# Allegro board capture.brd
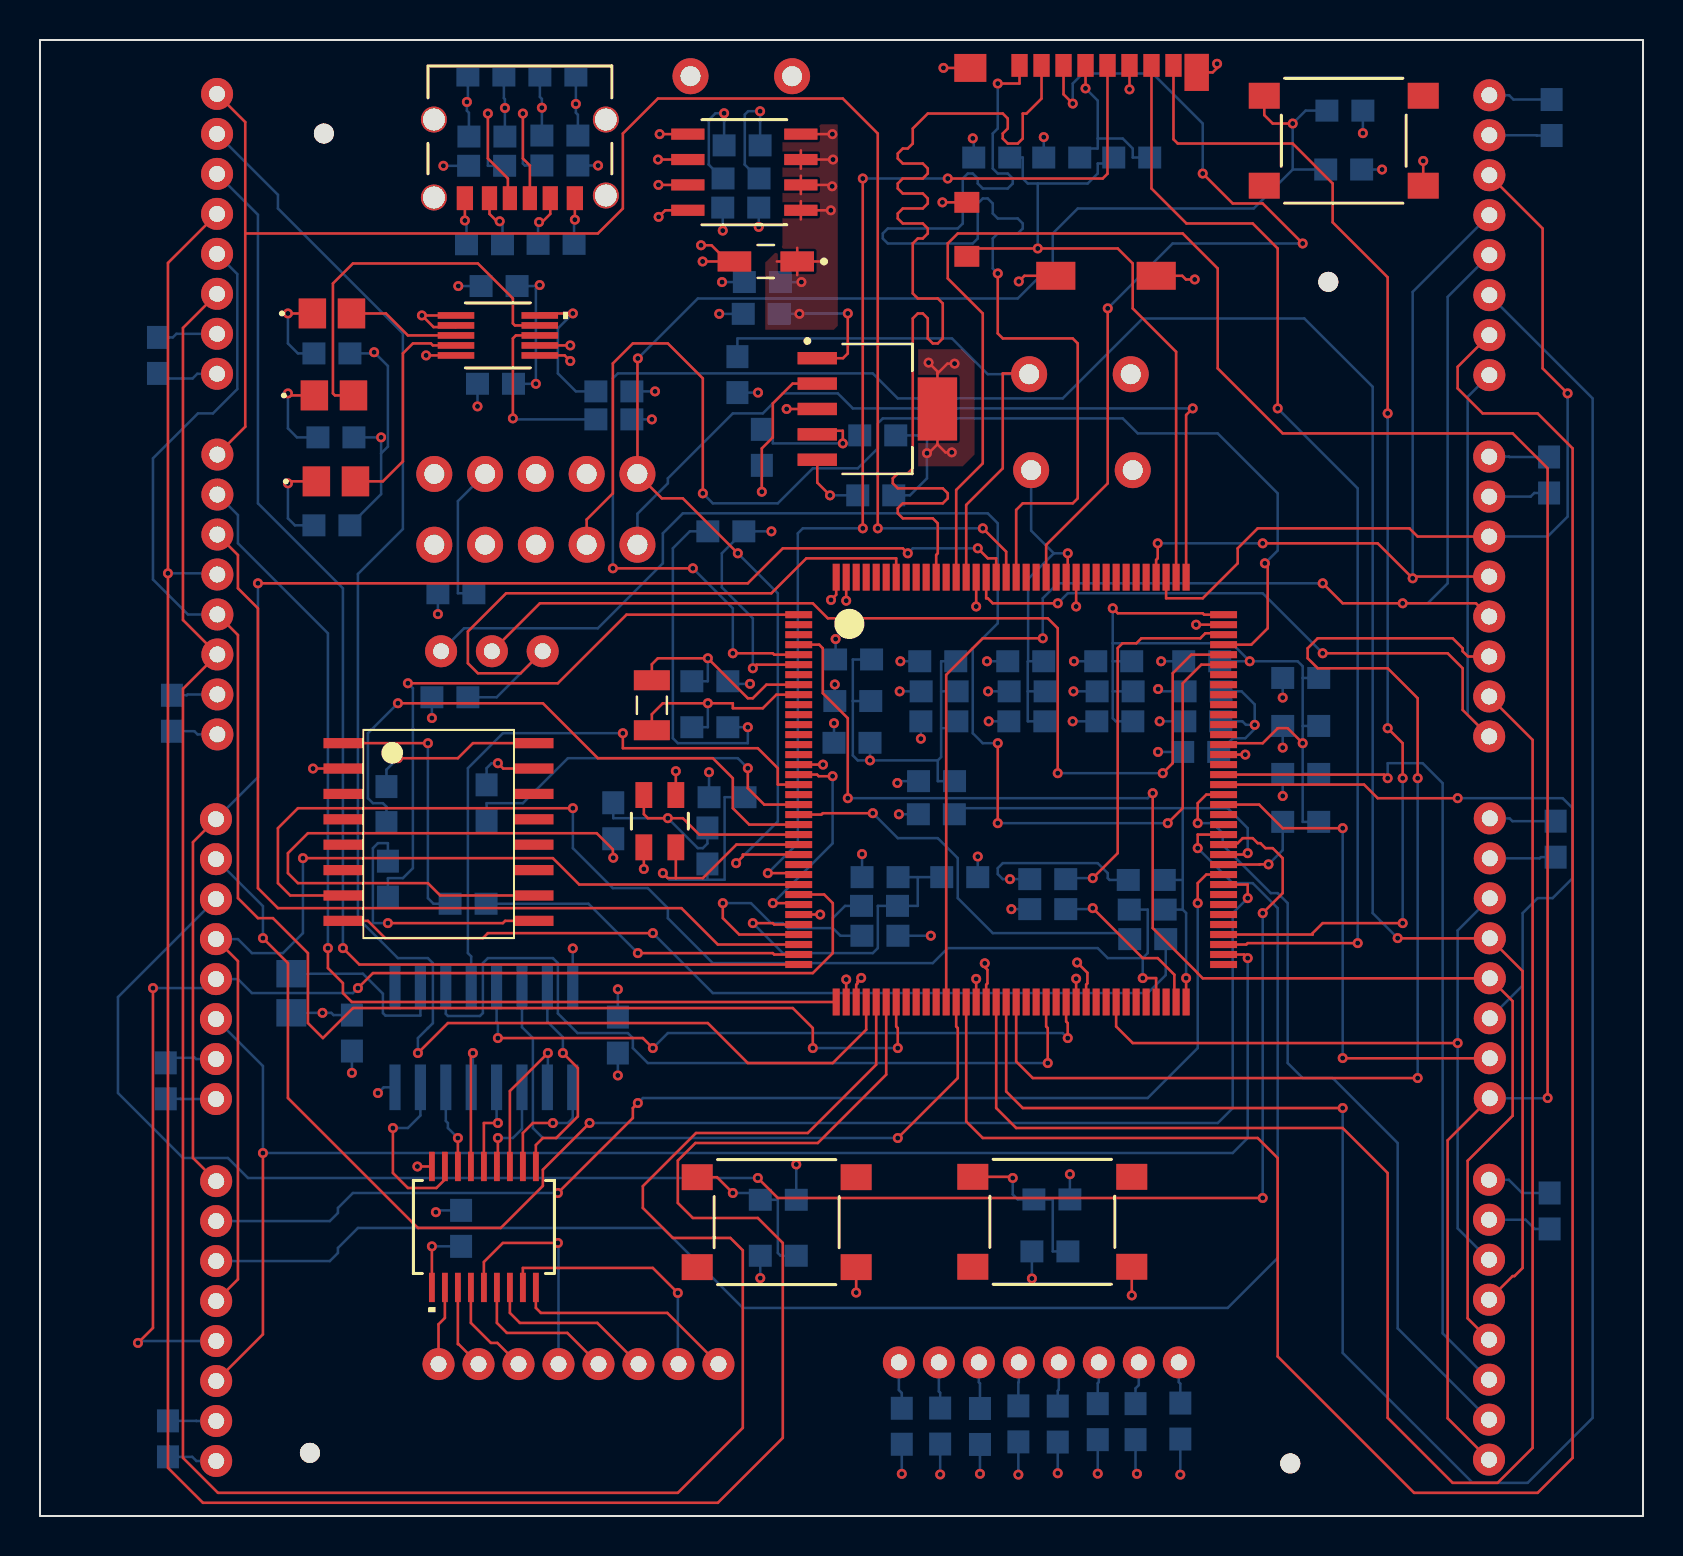
[diagram p0: board, top side]
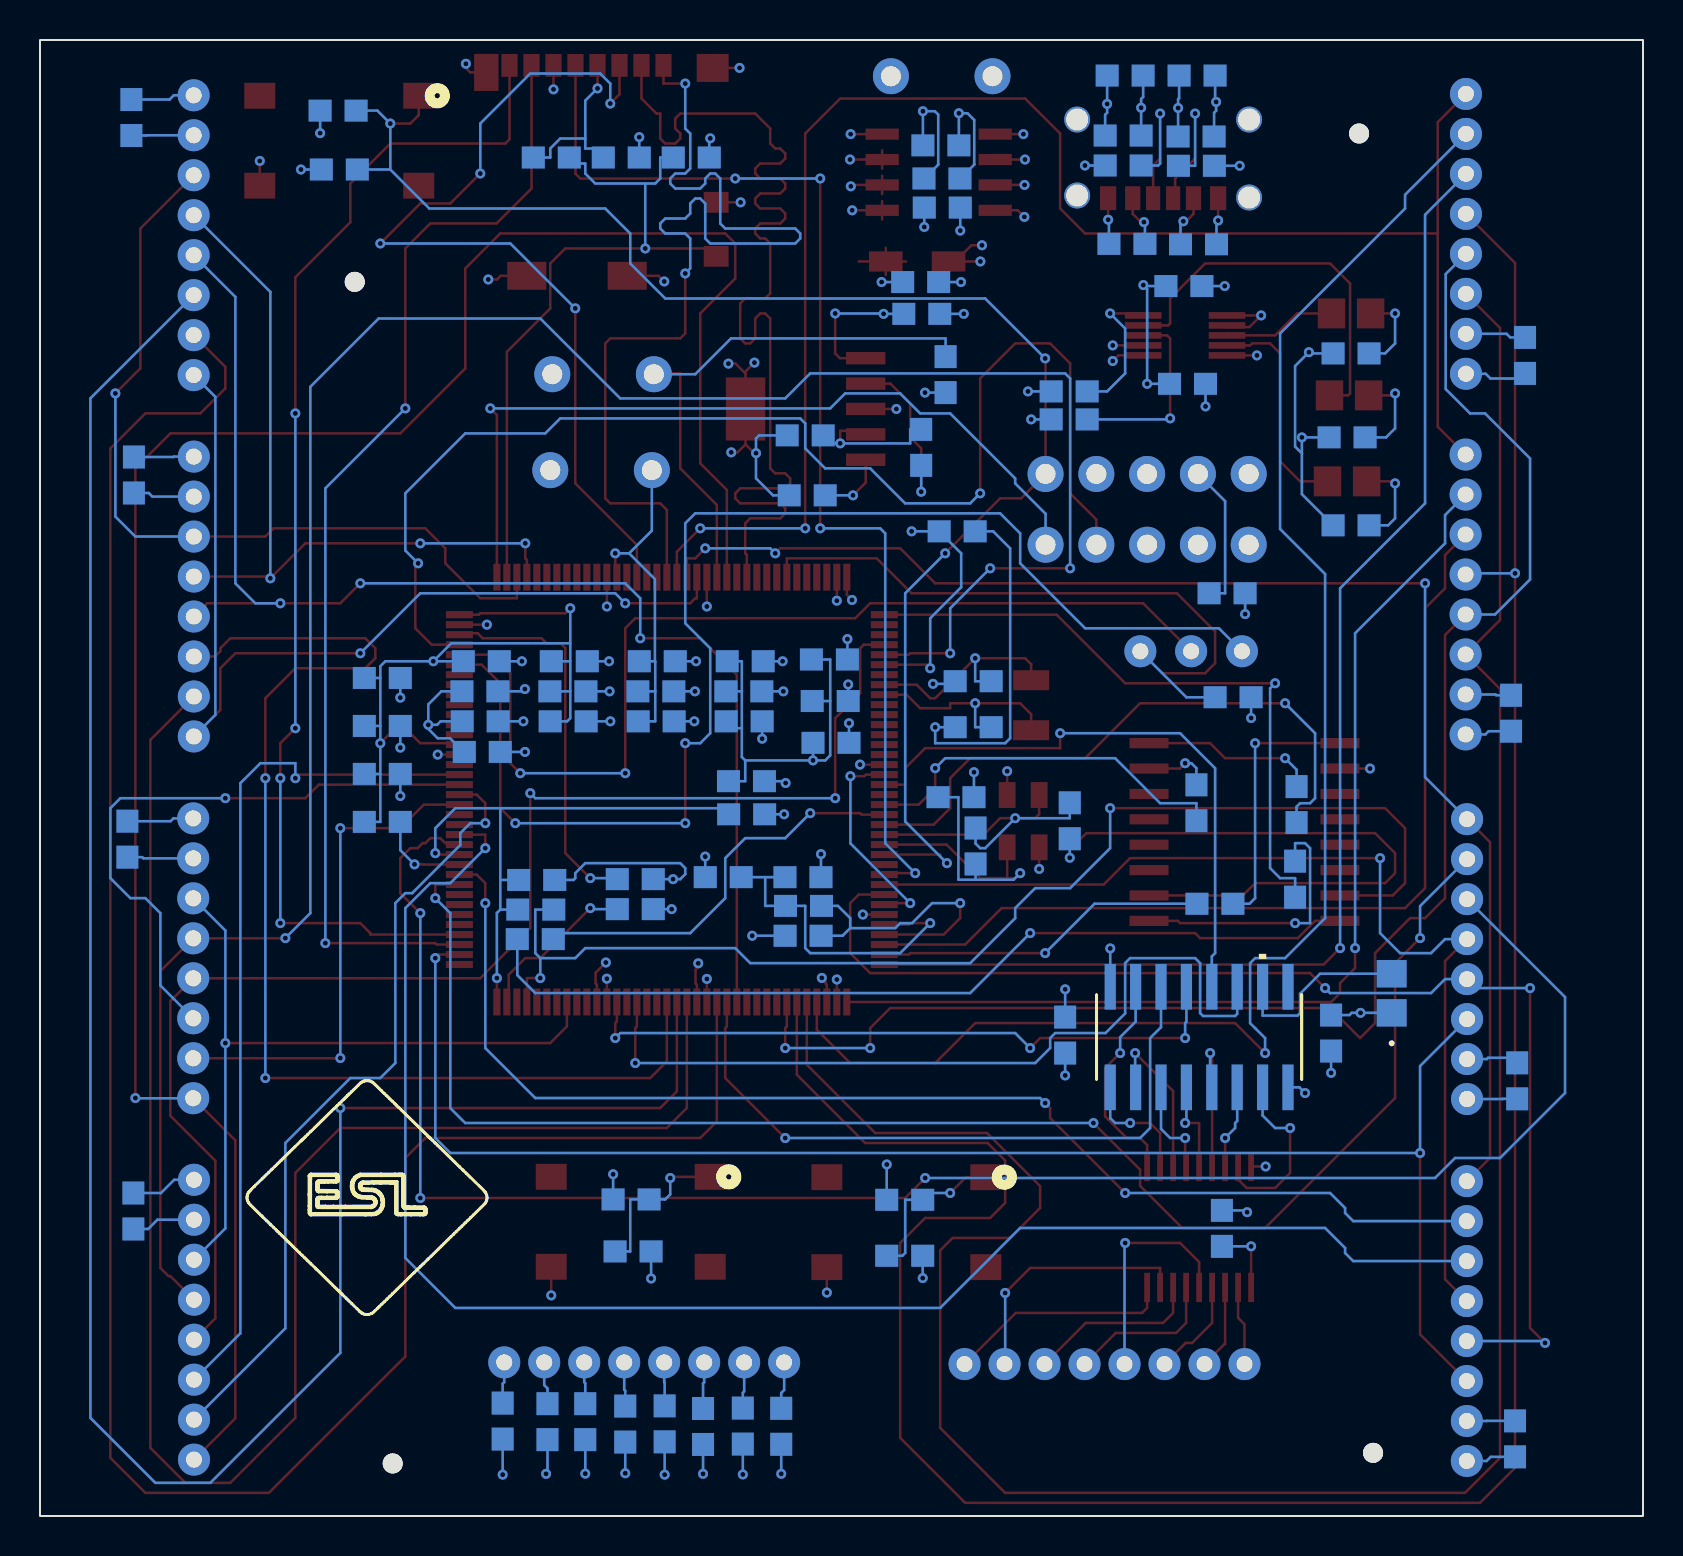
[diagram p1: board, bottom side, seen from below]

Outline 80.17 x 73.84 mm; copper layers: TOP, GND, VCC, BOTTOM. Coordinates in mm from the lower left corner of the outline.
Outline path: rectangle 0,0 80.17,73.84

## Design rules (mm)
constraint set DEFAULT: min track width 0.127
net group SD: nets N09085 N09089 N09093 N09097 N09165

## Placement (name value [footprint] x y rotation side)
C1  0.1uF  [0603_C]  34.3 49.26 180 bottom
C2  0.1uF  [0603_C]  20.8 46.16 180 bottom
C3  0.1uF  [0603_C]  50.9 4.6 90 bottom
C4  0.1uF  [0603_C]  52.9 4.72 90 bottom
C5  0.1uF  [0603_C]  45.02 4.5 90 bottom
C6  0.1uF  [0603_C]  48.93 4.61 90 bottom
C7  0.1uF  [0603_C]  54.79 4.72 90 bottom
C8  0.1uF  [0603_C]  47.01 4.48 90 bottom
C9  0.1uF  [0603_C]  43.1 4.49 90 bottom
C10  0.1uF  [0603_C]  57.03 4.75 90 bottom
C11  0.1uF  [0603_C]  21.06 14.39 90 bottom
C12  0.1uF  [0603_C]  28.9 24.06 270 bottom
C13  0.1uF  [0603_C]  15.6 24.16 270 bottom
C14  0.1uF  [0603_C]  55.33 31.82 180 bottom
C15  0.1uF  [0603_C]  5.9 58.06 90 bottom
C16  0.1uF  [0603_C]  6.6 40.16 90 bottom
C17  0.1uF  [0603_C]  65.2 67.36 0 bottom
C18  0.1uF  [0603_C]  6.29 21.77 90 bottom
C19  0.1uF  [0603_C]  36.92 13.02 180 bottom
C20  0.1uF  [0603_C]  6.4 3.86 90 bottom
C21  0.1uF  [0603_C]  50.51 13.24 180 bottom
C22  0.1uF  [0603_C]  75.6 69.96 270 bottom
C23  0.1uF  [0603_C]  75.47 52.08 270 bottom
C24  0.1uF  [0603_C]  75.8 33.86 270 bottom
C25  0.1uF  [0603_C]  46 31.96 0 bottom
C26  1uF  [0603_C]  42.01 31.96 180 bottom
C27  0.1uF  [0603_C]  75.5 15.26 270 bottom
C28  2.2uF  [0603_C]  50.4 30.36 180 bottom
C29  2.2uF  [0603_C]  50.4 31.86 180 bottom
C30  1.5pF  [0603_C]  33.5 41.76 180 bottom
C31  4.7uF  [0603_C]  40.69 42.85 0 bottom
C32  0.1uF  [0603_C]  49.3 42.76 180 bottom
C33  0.1uF  [0603_C]  44.9 42.76 180 bottom
C34  0.1uF  [0603_C]  53.7 42.76 180 bottom
C35  0.1uF  [0603_C]  58.1 42.76 180 bottom
C36  0.1uF  [0603_C]  58.15 39.76 180 bottom
C37  0.1uF  [0603_C]  53.77 41.25 180 bottom
C38  0.1uF  [0603_C]  44.97 41.25 180 bottom
C39  0.1uF  [0603_C]  40.65 40.77 180 bottom
C40  0.1uF  [0603_C]  49.37 41.25 180 bottom
C41  0.1uF  [0603_C]  58.17 41.25 180 bottom
C42  1.5pF  [0603_C]  33.5 39.46 180 bottom
C43  0.1uF  [0603_C]  49.35 39.76 180 bottom
C44  0.1uF  [0603_C]  53.75 39.76 180 bottom
C45  0.1uF  [0603_C]  44.95 39.76 180 bottom
C46  0.1uF  [0603_C]  44.84 36.76 180 bottom
C47  0.1uF  [0603_C]  58.05 38.22 180 bottom
C48  0.1uF  [0603_C]  40.61 38.68 180 bottom
C49  0.1uF  [0603_C]  63.05 37.12 180 bottom
C50  0.1uF  [0603_C]  63.05 41.92 180 bottom
C51  0.1uF  [0603_C]  63.05 34.72 180 bottom
C52  0.1uF  [0603_C]  63.05 39.52 180 bottom
C53  0.1uF  [0603_C]  44.83 35.1 180 bottom
C54  3.9pF  [0603_C]  34.36 35.96 180 bottom
C55  3.9pF  [0603_C]  28.67 34.78 270 bottom
C56  4.7uF  [0603_C]  22.23 63.62 0 bottom
C57  1uF  [0603_C]  22.35 69.01 180 bottom
C58  0.1uF  [0603_C]  25.9 72.06 180 bottom
C59  0.1uF  [0603_C]  22.3 72.06 180 bottom
C60  0.1uF  [0603_C]  25.81 63.64 0 bottom
C61  4.7uF  [0603_C]  35.11 68.57 0 bottom
C62  1uF  [0603_C]  22.78 56.64 180 bottom
C63  0.1uF  [0603_C]  35.06 66.91 180 bottom
C64  0.1uF  [0603_C]  22.96 61.53 180 bottom
C65  0.1uF  [0603_C]  35.05 65.45 180 bottom
C66  1uF  [0603_C]  36.07 60.14 180 bottom
C67  0.1uF  [0603_C]  36.12 61.73 180 bottom
C68  1uF  [0603_C]  41.8 51.06 0 bottom
C69  0.1uF  [0603_C]  34.88 57.1 270 bottom
C70  0.1uF  [0603_C]  47.6 67.96 180 bottom
C71  0.1uF  [0603_C]  51.1 67.96 180 bottom
D1  DIODE_SCHOTTKY  [SHORTKEY]  36.3 62.76 180 top
J1  10pin header(2.54mm)  [10PIN_DEBUG_2]  24.8 50.36 0 top
J2  HEADER 3  [3PIN_HOLE]  22.6 43.26 0 top
J3  CONN_008P_000C_1  [8PIN_CONNECTOR]  17.93 7.6 0 top
J4  CONN_008P_000C_1  [8PIN_CONNECTOR]  40.95 7.69 0 top
J5  CONN_008P_000C_1  [8PIN_CONNECTOR]  8.86 73.14 270 top
J6  CONN_008P_000C_1  [8PIN_CONNECTOR]  8.87 55.1 270 top
J7  CONN_008P_000C_1  [8PIN_CONNECTOR]  8.8 36.86 270 top
J8  CONN_008P_000C_1  [8PIN_CONNECTOR]  8.81 18.75 270 top
J9  CONN_008P_000C_1  [8PIN_CONNECTOR]  72.49 55.07 90 top
J10  CONN_008P_000C_1  [8PIN_CONNECTOR]  72.48 37 90 top
J11  CONN_008P_000C_1  [8PIN_CONNECTOR]  72.51 18.9 90 top
J12  CONN_008P_000C_1  [8PIN_CONNECTOR]  72.47 0.82 90 top
J13  Molex 2171750001  [USB_2]  24 68.96 180 top
J14  2PIN HEADER  [BATTERY_PIN]  52.01 57.12 0 top
J15  VBAT  [BATTERY_PIN]  35.07 72.03 0 top
J16  2PIN HEADER  [BATTERY_PIN]  52.11 52.32 0 top
J17  104031-0811  [SD_CARD]  51.96 67.76 180 top
NOREF  -  [unnamed]  13.5 3.16 0 top
NOREF#2  -  [unnamed]  64.43 61.74 0 top
NOREF#3  -  [unnamed]  62.53 2.63 0 top
NOREF#4  -  [unnamed]  14.2 69.16 0 top
NOREF#5  -  [#2]  70.84 9.19 180 bottom
Q1  FDS6681Z  [PMOSFET]  35.23 67.22 0 top
R1  10k  [0603_R]  20.5 40.96 180 bottom
R2  10k  [0805_R]  12.57 26.15 90 bottom
R3  33  [0603_R]  21.41 30.63 0 bottom
R4  33  [0603_R]  17.33 35.59 90 bottom
R5  33  [0603_R]  22.33 35.68 90 bottom
R6  10k  [0603_R]  55.37 30.34 0 bottom
R7  33  [0603_R]  55.4 28.86 180 bottom
R8  33  [0603_R]  17.4 31.86 90 bottom
R9  10k  [0603_R]  65.26 70.31 180 bottom
R10  10k  [0603_R]  36.92 15.82 180 bottom
R11  10k  [0603_R]  50.61 15.84 180 bottom
R12  0k  [0603_R]  42.01 29.03 180 bottom
R13  0k  [0603_R]  41.99 30.52 180 bottom
R14  47  [0603_R]  33.38 33.52 270 bottom
R15  5.1k  [0603_R]  26 67.56 0 bottom
R16  5.1k  [0603_R]  22.34 67.55 180 bottom
R17  1k  [0603_R]  28.7 56.26 0 bottom
R18  10k  [0603_R]  28.7 54.86 0 bottom
R19  100k  [0603_R]  26 69.06 180 bottom
R20  52.3k  [0603_R]  36.1 53.46 90 bottom
R21  30.1k  [0603_R]  41.9 54.06 0 bottom
R22  330  [0603_R]  14.6 58.16 0 bottom
R23  330  [0603_R]  14.6 49.56 0 bottom
R24  330  [0603_R]  14.8 53.96 0 bottom
R25  10k  [0603_R]  54.6 67.96 180 bottom
SW1  NRST  [BUTTON]  65.2 68.8 0 top
SW2  USER_BUTTON_1  [BUTTON]  36.84 14.7 0 top
SW3  USER_BUTTON_2  [BUTTON]  50.63 14.72 0 top
U1  MM74HC595MX  [MM74_1]  22.2 23.96 90 bottom
U2  TBD62083AFG,EL  [TBD_1]  22.2 14.46 270 top
U3  MX25L25645GMI-08G  [MX25]  19.93 34.22 270 top
U4  STM32H7X3ZIT_B  [STM32H743]  48.57 36.34 0 top
U5  -  [MCP73833]  22.9 59.06 0 top
U6  TPS73733DCQ  [TPS75733]  41.88 55.38 0 top
U7  LED_RED  [0805_U]  14.6 60.16 0 top
U8  LED_BLUE  [0805_U]  14.8 51.76 0 top
U9  LED_GREEN  [0805_U]  14.7 56.06 0 top
Y1  32.768KHZ  [LOW_CRYSTAL]  30.6 40.56 90 top
Y2  NX3225SA-24P000M-STD-CSR-1  [FASTCRYSTAL]  31 34.76 0 top

## Library data of the parts
C1-C71 = C
D1 = MBR120VLSFT1G
J1 = FTSH-105-01-F-DV-K
J2 = HEADER 3
J3-J12 = B8B-PH-SM4-TBLFSN
J13 = 2171750001_2
J14-J16 = HEADER 2
J17 = 104031-0811_8
Q1 = FDS6681Z
R1-R25 = R
SW1-SW3 = PTS645SH50SMTR92LFS
U1 = MM74HC595MX_7
U2 = TBD62083AFG_0
U3 = W25Q256JV_1
U4 = STM32H743ZIT6_9
U5 = MCP73833_1
U6 = TPS73733DCQ_1
U7-U9 = DIODE_PWL4
Y1 = CM7V-T1A-LOW-ESR-32768KHZ-6PF
Y2 = NX3225SA-24P000M-STD-CSR-1

## Footprints (pads in the part's own frame, mm; a bottom-side part is the same pattern mirrored in y, then rotated)
3PIN_HOLE
  round 1.6 hole 0.8: 1(-2.54,0) 2(0,0) 3(2.54,0)
8PIN_CONNECTOR
  round 1.6 hole 0.8: 1(16,0) 2(14,0) 3(12,0) 4(10,0) 5(8,0) 6(6,0) 7(4,0) 8(2,0)
10PIN_DEBUG_2
  round 1.8 hole 1: 1(5.08,1.77) 2(2.54,1.77) 3(0,1.77) 4(-2.54,1.77) 5(-5.08,1.77) 6(-5.08,-1.77) 7(-2.54,-1.77) 8(0,-1.77) 9(2.54,-1.77) 10(5.08,-1.77)
0603_C
  rect 1.15x1.1 smd: 1(0.9,0) 2(-0.9,0)
0603_R
  rect 1.15x1.1 smd: 1(0.9,0) 2(-0.9,0)
0805_R
  rect 1.372x1.499 smd: 1(-0.978,0) 2(0.978,0)
0805_U
  rect 1.372x1.499 smd: 1(-0.978,0) 2(0.978,0)
BATTERY_PIN
  round 1.8 hole 1: 1(-2.54,0) 2(2.54,0)
BUTTON
  rect 1.549x1.295 smd: 1(-3.975,2.25) 2(3.975,2.25) 3(-3.975,-2.25) 4(3.975,-2.25)
FASTCRYSTAL
  rect 0.838x1.295 smd: 1(-0.8,1.308) 2(-0.8,-1.308) 3(0.8,-1.308) 4(0.8,1.308)
LOW_CRYSTAL
  rect 1x1.8 smd: 1(-1.25,0) 2(1.25,0)
MCP73833
  rect 1.829x0.33 smd: 1(-2.095,1) 2(-2.095,0.5) 3(-2.095,0) 4(-2.095,-0.5) 5(-2.095,-1) 6(2.095,-1) 7(2.095,-0.5) 8(2.095,0) 9(2.095,0.5) 10(2.095,1)
MM74_1
  rect 2.286x0.559 smd: 1(-2.515,4.445) 2(-2.515,3.175) 3(-2.515,1.905) 4(-2.515,0.635) 5(-2.515,-0.635) 6(-2.515,-1.905) 7(-2.515,-3.175) 8(-2.515,-4.445) 9(2.515,-4.445) 10(2.515,-3.175) 11(2.515,-1.905) 12(2.515,-0.635) 13(2.515,0.635) 14(2.515,1.905) 15(2.515,3.175) 16(2.515,4.445)
MX25
  rect 0.51x1.95 smd: 1(-4.445,-4.775) 2(-3.175,-4.775) 3(-1.905,-4.775) 4(-0.635,-4.775) 5(0.635,-4.775) 6(1.905,-4.775) 7(3.175,-4.775) 8(4.445,-4.775) 9(4.445,4.775) 10(3.175,4.775) 11(1.905,4.775) 12(0.635,4.775) 13(-0.635,4.775) 14(-1.905,4.775) 15(-3.175,4.775) 16(-4.445,4.775)
PMOSFET
  rect 1.664x0.559 smd: 1(-2.826,1.905) 2(-2.826,0.635) 3(-2.826,-0.635) 4(-2.826,-1.905) 5(2.826,-1.905) 6(2.826,-0.635) 7(2.826,0.635) 8(2.826,1.905)
SD_CARD
  rect 0.813x1.143 smd: 1(2.975,-4.81) 2(1.875,-4.81) 3(0.775,-4.81) 4(-0.325,-4.81) 5(-1.425,-4.81) 6(-2.525,-4.81) 7(-3.625,-4.81) 8(-4.725,-4.81)
  rect 1.245x1.041 smd: 9(5.61,2.04) 10(5.61,4.74)
  rect 1.219x1.854 smd: 11(-5.885,-4.46)
  rect 1.6x1.397 smd: 12(5.435,-4.685)
  rect 1.956x1.397 smd: 13(-3.86,5.715) 14(1.16,5.715)
SHORTKEY
  rect 1.68x1.01 smd: 1(-1.57,0) 2(1.57,0)
STM32H743
  rect 1.346x0.356 smd: 1(-10.625,8.75) 2(-10.625,8.25) 3(-10.625,7.75) 4(-10.625,7.25) 5(-10.625,6.75) 6(-10.625,6.25) 7(-10.625,5.75) 8(-10.625,5.25) 9(-10.625,4.75) 10(-10.625,4.25) 11(-10.625,3.75) 12(-10.625,3.25) 13(-10.625,2.75) 14(-10.625,2.25) 15(-10.625,1.75) 16(-10.625,1.25) 17(-10.625,0.75) 18(-10.625,0.25) 19(-10.625,-0.25) 20(-10.625,-0.75) 21(-10.625,-1.25) 22(-10.625,-1.75) 23(-10.625,-2.25) 24(-10.625,-2.75) 25(-10.625,-3.25) 26(-10.625,-3.75) 27(-10.625,-4.25) 28(-10.625,-4.75) 29(-10.625,-5.25) 30(-10.625,-5.75) 31(-10.625,-6.25) 32(-10.625,-6.75) 33(-10.625,-7.25) 34(-10.625,-7.75) 35(-10.625,-8.25) 36(-10.625,-8.75) 73(10.625,-8.75) 74(10.625,-8.25) 75(10.625,-7.75) 76(10.625,-7.25) 77(10.625,-6.75) 78(10.625,-6.25) 79(10.625,-5.75) 80(10.625,-5.25) 81(10.625,-4.75) 82(10.625,-4.25) 83(10.625,-3.75) 84(10.625,-3.25) 85(10.625,-2.75) 86(10.625,-2.25) 87(10.625,-1.75) 88(10.625,-1.25) 89(10.625,-0.75) 90(10.625,-0.25) 91(10.625,0.25) 92(10.625,0.75) 93(10.625,1.25) 94(10.625,1.75) 95(10.625,2.25) 96(10.625,2.75) 97(10.625,3.25) 98(10.625,3.75) 99(10.625,4.25) 100(10.625,4.75) 101(10.625,5.25) 102(10.625,5.75) 103(10.625,6.25) 104(10.625,6.75) 105(10.625,7.25) 106(10.625,7.75) 107(10.625,8.25) 108(10.625,8.75)
  rect 0.356x1.346 smd: 37(-8.75,-10.625) 38(-8.25,-10.625) 39(-7.75,-10.625) 40(-7.25,-10.625) 41(-6.75,-10.625) 42(-6.25,-10.625) 43(-5.75,-10.625) 44(-5.25,-10.625) 45(-4.75,-10.625) 46(-4.25,-10.625) 47(-3.75,-10.625) 48(-3.25,-10.625) 49(-2.75,-10.625) 50(-2.25,-10.625) 51(-1.75,-10.625) 52(-1.25,-10.625) 53(-0.75,-10.625) 54(-0.25,-10.625) 55(0.25,-10.625) 56(0.75,-10.625) 57(1.25,-10.625) 58(1.75,-10.625) 59(2.25,-10.625) 60(2.75,-10.625) 61(3.25,-10.625) 62(3.75,-10.625) 63(4.25,-10.625) 64(4.75,-10.625) 65(5.25,-10.625) 66(5.75,-10.625) 67(6.25,-10.625) 68(6.75,-10.625) 69(7.25,-10.625) 70(7.75,-10.625) 71(8.25,-10.625) 72(8.75,-10.625) 109(8.75,10.625) 110(8.25,10.625) 111(7.75,10.625) 112(7.25,10.625) 113(6.75,10.625) 114(6.25,10.625) 115(5.75,10.625) 116(5.25,10.625) 117(4.75,10.625) 118(4.25,10.625) 119(3.75,10.625) 120(3.25,10.625) 121(2.75,10.625) 122(2.25,10.625) 123(1.75,10.625) 124(1.25,10.625) 125(0.75,10.625) 126(0.25,10.625) 127(-0.25,10.625) 128(-0.75,10.625) 129(-1.25,10.625) 130(-1.75,10.625) 131(-2.25,10.625) 132(-2.75,10.625) 133(-3.25,10.625) 134(-3.75,10.625) 135(-4.25,10.625) 136(-4.75,10.625) 137(-5.25,10.625) 138(-5.75,10.625) 139(-6.25,10.625) 140(-6.75,10.625) 141(-7.25,10.625) 142(-7.75,10.625) 143(-8.25,10.625) 144(-8.75,10.625)
TBD_1
  rect 1.466x0.291 smd: 1(-3.026,2.6) 2(-3.026,1.95) 3(-3.026,1.3) 4(-3.026,0.65) 5(-3.026,0) 6(-3.026,-0.65) 7(-3.026,-1.3) 8(-3.026,-1.95) 9(-3.026,-2.6) 10(3.026,-2.6) 11(3.026,-1.95) 12(3.026,-1.3) 13(3.026,-0.65) 14(3.026,0) 15(3.026,0.65) 16(3.026,1.3) 17(3.026,1.95) 18(3.026,2.6)
TPS75733
  rect 1.97x0.62 smd: 1(-3.005,2.54) 2(-3.005,1.27) 3(-3.005,0) 4(-3.005,-1.27) 5(-3.005,-2.54)
  rect 1.97x3.16 smd: 6(3.005,0)
unnamed
  round 1 hole 3.2 unplated: (0,0)
USB_2
  oval 1.3x1.3 hole 1.1: (-4.3,2.9) (-4.3,-0.9) (4.3,3) (4.3,-0.9)
  rect 0.711x1.194 smd: A5(-0.5,3.034) B5(0.5,3.034)
  rect 0.762x1.194 smd: A9(1.52,3.034) B9(-1.52,3.034)
  rect 0.813x1.194 smd: A12(2.75,3.034) B12(-2.75,3.034)

## Nets
5V: C56.1 C57.2 C58.2 C59.2 C60.2 D1.2 J13.A9 J13.B9(VBUS2) Q1.4 R19.2 R22.1 R23.1 R24.1 U5.1 U5.2
GND: C1.1 C2.1 C3.1 C4.1 C5.1 C6.1 C7.1 C8.1 C9.1 C10.1 C11.1 C12.1 C13.1 C14.1 C15.1 C16.1 C17.1 C18.1 C19.1 C20.1 C21.1 C22.1 C23.1 C24.1 C25.1 C26.1 C27.1 C28.1 C29.1 C30.2 C31.2 C32.1 C33.1 C34.1 C35.1 C36.1 C37.1 C38.1 C39.1 C40.1 C41.1 C42.2 C43.1 C44.1 C45.1 C46.1 C47.1 C48.1 C49.1 C50.1 C51.1 C52.1 C53.1 C54.1 C55.1 C56.2 C57.1 C58.1 C59.1 C60.1 C61.2 C62.1 C63.1 C64.1 C65.1 C66.1 C67.1 C68.1 C69.1 C70.1 C71.1 J1.3 J1.8 J4.1 J4.2 J4.3 J4.4 J4.5 J4.6 J4.7 J4.8 J5.2 J6.2 J7.2 J8.2 J9.2 J10.2 J11.2 J12.2 J13.A12 J13.B12 J14.2 J15.2 J16.2 J17.6(VSS) J17.9 J17.11 J17.12 J17.13 J17.14 R1.1 R15.1 R16.1 R17.1 R18.1 R19.1 R21.1 SW1.4 SW2.4 SW3.4 U1.8 U2.9 U3.10 U4.16 U4.31 U4.38 U4.51 U4.61 U4.83 U4.94 U4.107 U4.120 U4.130 U4.143 U5.5(VSS) U6.3 U6.6 Y2.2 Y2.4
VBAT: C61.1 C62.2 C63.2 C64.2 C65.2 J15.1 Q1.1 Q1.2 Q1.3 U5.6 U5.7
VDD_MCU: C1.2 C2.2 C3.2 C4.2 C5.2 C6.2 C7.2 C8.2 C9.2 C10.2 C11.2 C12.2 C13.2 C14.2 C15.2 C16.2 C18.2 C20.2 C22.2 C23.2 C24.2 C27.2 C31.1 C32.2 C33.2 C34.2 C35.2 C36.2 C37.2 C38.2 C39.2 C40.2 C41.2 C43.2 C44.2 C45.2 C46.2 C47.2 C48.2 C49.2 C50.2 C51.2 C52.2 C53.2 C68.2 C69.2 C71.2 J1.4 J1.7 J5.1 J6.1 J7.1 J8.1 J9.1 J10.1 J11.1 J12.1 J14.1 J16.1 J17.4 R2.1 R6.1 R9.2 R10.2 R11.2 R12.2 R20.2 R25.2 U1.16 U2.10 U3.2 U4.6 U4.17 U4.30 U4.39 U4.52 U4.62 U4.72 U4.84 U4.95 U4.108 U4.121 U4.131 U4.144 U6.2(OUT) U6.5
VDDA: R12.1 R13.1 U4.33
VIN: C66.2 C67.2 D1.1 Q1.5 Q1.6 Q1.7 Q1.8 U6.1
I1_IN: U1.15 U2.1
I2_IN: U1.1 U2.2
I3_IN: U1.2 U2.3
I4_IN: U1.3 U2.4
I5_IN: U1.4 U2.5
I6_IN: U1.5 U2.6
I7_IN: U1.6 U2.7
I8_IN: U1.7 U2.8
OUT1: J3.1 U2.18
OUT2: J3.2 U2.17
OUT3: J3.3 U2.16
OUT4: J3.4 U2.15
OUT5: J3.5 U2.14
OUT6: J3.6 U2.13
OUT7: J3.7 U2.12
OUT8: J3.8 U2.11(O8)
PA0_SPI1_INT2: J6.6 U4.34
PA2_SPI1_INT1: J5.6 U4.36
PA3_SPI1_CS2: J6.7 U4.37
PA4_SPI1_CS1: J5.7 U4.40
PA5_SPI1_SCK: J5.3 J6.3 U4.41
PA6_SPI1_MISO: J5.5 J6.5 U4.42
PA7_SPI1_MOSI: J5.4 J6.4 U4.43
PB2_SPI3_MOSI: J9.5 J10.5 U4.48
PB13_SPI2_SCK: J7.3 J8.3 U4.74
PC2_C_SPI2_MISO: J7.5 J8.5 U4.28
PC3_C_SPI2_MOSI: J7.4 J8.4 U4.29
PC10_SPI3_SCK: J9.3 J10.3 U4.111
PC11_SPI3_MISO: J9.4 J10.4 U4.112
PC14-OSC32_IN: C30.1 U4.8 Y1.2
PC15-OSC32_OUT: C42.1 U4.9 Y1.1
PD12_SPI2_CS1: J7.7 U4.81
PD13_SPI2_CS2: J8.7 U4.82
PD14_SPI2_INT1: J7.6 U4.85
PD15_SPI2_INT2: J8.6 U4.86
PE5_SPI4_MISO: J11.5 J12.5 U4.4
PE6_SPI4_MOSI: J11.4 J12.4 U4.5
PE12_SPI4_SCK: J11.3 J12.3 U4.65
PF12_SPI3_CS1: J9.7 U4.50
PF13_SPI3_CS2: J10.7 U4.53
PF14_SPI3_INT1: J9.6 U4.54
PF15_SPI3_INT2: J10.6 U4.55
PG: U5.9 U9.2
PG4_SPI4_CS1: J11.7 U4.89
PG5_SPI4_CS2: J12.7 U4.90
PG6_SPI4_INT1: J11.6 U4.91
PG7_SPI4_INT2: J12.6 U4.92
PG11_USER_BUTTON_1: C19.2 R10.1 SW2.1
PG12_SPI1_FSYNC: J5.8 J6.8 U4.127
PG12_USER_BUTTON_2: C21.2 R11.1 SW3.1
PG13_SPI2_FSYNC: J7.8 J8.8 U4.128
PG14_SPI3_FSYNC: J9.8 J10.8 U4.129
PG15_SPI4_FSYNC: J11.8 J12.8 U4.132
PH0-OSC_IN: C55.2 R14.2 U4.23 Y2.1
PH1-OSC_OUT: C54.2 R14.1 U4.24 Y2.3
STAT1: U5.3 U7.2
STAT2: U5.4 U8.2
VREF+: C25.2 C26.2 R13.2 U4.32
N01598: J13.A5 R15.2
N01665: J13.B5 R16.2
N02907: R17.2 U5.10
N02981: R18.2 U5.8
N04161: J1.10 U4.109
N04181: J1.9 U4.105
N04185: J2.2 U4.104
N04189: J2.1 U4.103
N04193: C17.2 J1.1 R9.1 SW1.1 U4.25
N05042: R4.2 U4.22
N05048: R6.2 U3.7 U4.69
N05076: R5.2 U4.20
N05082: R7.1 U4.21
N05106: R8.2 U4.1
N05112: R3.1 U4.35
N08089: R20.1 R21.2 U6.4
N09057: C70.2 J17.10 R25.1 U4.110
N09085: J17.2 U4.134
N09089: J17.1 U4.126
N09093: J17.8 U4.76
N09097: J17.7 U4.75
N09165: J17.5 U4.27
N09169: J17.3 U4.123
N09317: U1.11 U4.58
N09327: U1.12 U4.18
N09331: U1.13 U4.60
N09335: U1.14 U4.49
N10077: J2.3 R1.2 U4.138
N023560: R22.2 U7.1(P)
N023820: R23.2 U8.1(P)
N025640: R24.2 U9.1(P)
N60130: R2.2 U1.10(\S\C\L\R\)
N110068: C28.2 U4.71
N110088: C29.2 U4.106
N1399340: R3.2 U3.1
N1399347: R7.2 U3.8
N1399348: R8.1 U3.9(W\P\(IO2))
N13993414: R5.1 U3.15
N13993415: R4.1 U3.16

Pads without a net: J1 2 5 6; SW1 2 3; SW2 2 3; SW3 2 3; U1 9; U3 3 4 5 6 11 12 13 14; U4 2 3 7 10 11 12 13 14 15 19 26 44 45 46 47 56 57 59 63 64 66 67 68 70 73 77 78 79 80 87 88 93 96 97 98 99 100 101 102 113 114 115 116 117 118 119 122 124 125 133 135 136 137 139 140 141 142

## Via types
v1: diameter 0.5, hole 0.25, TOP to BOTTOM, 273 vias

## Routing (per net, layer and track width the routed paths; a pad name or vN(x,y) marks a point on that pad's centre or on a via; arc(x,y) is an arc through that point)
5V: length 33.1
  TOP w0.127: Q1.4 31.27,65.32 v1(30.94,64.99) ; J13.B9 25.52,65.14 25.11,64.73 v1(24.96,64.73) ; D1.2 34.4,62.76 ; 34.4,62.76 v1(33.14,62.76) ; 34.4,62.76 33.59,63.57 v1(33.06,63.57) ; U5.1 v1(19.1,60.06) 19.68,59.48 20.8,59.48 U5.2 ; v1(22.99,64.77) 22.85,64.77 22.48,65.14 J13.A9
  BOTTOM w0.127: R24.1 v1(17.06,53.96) 17.06,53.16 ; C57.2 v1(23.25,70.44) 23.25,70.88 23.2,70.93 C59.2 ; 17.06,53.16 17.06,51.12 R23.1 ; 17.06,53.16 17.4,53.5 17.4,57.53 v1(16.71,58.22) 16.65,58.16 R22.1 ; C56.1 23.13,64.63 v1(22.99,64.77) ; C58.2 v1(26.8,70.64) 26.8,70.2 26.9,70.1 R19.2 ; C60.2 24.91,64.68 v1(24.96,64.73)
GND: length 306.9
  TOP w0.127: U6.3 v1(37.34,55.38) ; v1(45.74,57.65) 45.38,57.65 44.88,57.15 ; J17.12 v1(45.18,72.44) ; U3.10 20.02,31.04 19.4,31.66 12.9,31.66 12.4,32.16 12.4,33.16 13.4,34.16 27.84,34.16 28.65,33.35 28.65,32.95 v1(28.67,32.93) ; U5.5 v1(19.31,58.06) ; J17.11 58.65,72.22 58.87,72.44 v1(58.87,72.65) ; U4.61 v1(51.82,26.88) ; v1(61.44,32.6) 61,32.6 60.99,32.59 U4.83 ; U4.143 v1(40.32,45.79) ; v1(57.75,61.86) 57.31,61.86 57.13,62.04 J17.13 ; U4.107 v1(57.82,44.59) ; v1(44.36,53.17) 44.44,53.17 44.88,53.61 ; J17.14 49.23,62.04 v1(48.95,61.76) ; U4.38 v1(40.32,26.84) ; SW2.4 v1(40.82,11.18) ; J17.6 v1(54.49,71.37) ; 44.88,57.15 44.88,57.26 v1(44.44,57.7) ; 44.88,57.15 U6.6 44.88,53.61 ; Y2.4 v1(31.8,37.26) ; 44.88,53.61 45.28,53.21 v1(45.6,53.21) ; U4.31 v1(39.02,30.09) ; U4.120 v1(51.82,45.5) ; U4.94 v1(60.28,38.09) ; U2.9 v1(18.87,17.49) ; U4.16 v1(39.16,37.59) ; SW1.4 v1(69.18,67.79) ; Y2.2 v1(30.2,32.37) ; U4.130 v1(46.82,45.5) ; SW3.4 v1(54.6,11.04) ; J13.A12 v1(21.25,64.81) ; J17.9 v1(45.13,65.72) ; U4.51 v1(46.82,26.87) ; J13.B12 v1(26.75,64.85)
  GND w0.127: 71.5,51 J10.2 ; J10.2 72.48,50.02 ; J10.2 73.46,51 ; J10.2 72.48,51.98 ; 52.95,6.71 J4.3 ; J4.3 52.95,8.66 ; J4.3 51.97,7.69 ; J4.3 53.93,7.69 ; 54.55,56.04 J14.2 ; J14.2 53.47,57.12 ; J14.2 55.63,57.12 ; J14.2 54.55,58.2 ; J4.4 51.93,7.69 ; J4.4 50.95,8.66 ; J4.4 49.97,7.69 ; J4.4 50.95,6.71 ; 54.95,6.71 J4.2 ; J4.2 53.97,7.69 ; J4.2 55.93,7.69 ; J4.2 54.95,8.66 ; 24.8,51.05 J1.3 ; J1.3 23.72,52.13 ; J1.3 24.8,53.21 ; J1.3 25.88,52.13 ; J4.6 46.95,8.66 ; J4.6 46.95,6.71 ; J4.6 45.97,7.69 ; J4.6 47.93,7.69 ; J4.5 48.95,8.66 ; J4.5 49.93,7.69 ; J4.5 48.95,6.71 ; J4.5 47.97,7.69 ; J8.2 9.79,4.75 ; J8.2 8.81,5.73 ; J8.2 7.83,4.75 ; J8.2 8.81,3.78 ; J7.2 8.8,23.84 ; J7.2 7.82,22.86 ; J7.2 9.78,22.86 ; J7.2 8.8,21.88 ; J4.1 57.93,7.69 ; J4.1 56.95,8.66 ; J4.1 55.97,7.69 ; J4.1 56.95,6.71 ; 71.53,32.9 J11.2 ; J11.2 72.51,33.88 ; J11.2 73.48,32.9 ; J11.2 72.51,31.92 ; 7.89,41.1 J6.2 ; J6.2 8.87,40.12 ; J6.2 9.85,41.1 ; J6.2 8.87,42.08 ; 72.49,68.1 J9.2 ; J9.2 72.49,70.05 ; J9.2 71.51,69.07 ; J9.2 73.46,69.07 ; J15.2 38.69,72.03 ; J15.2 36.54,72.03 ; J15.2 37.61,73.11 ; J15.2 37.61,70.95 ; 23.72,48.59 J1.8 ; J1.8 24.8,49.67 ; J1.8 25.88,48.59 ; J1.8 24.8,47.51 ; 46.67,72.32 46.06,71.71 46.06,65.72 ; 42.95,6.71 J4.8 ; J4.8 43.93,7.69 ; J4.8 41.97,7.69 ; J4.8 42.95,8.66 ; J12.2 72.47,15.8 ; J12.2 73.45,14.82 ; J12.2 71.49,14.82 ; J12.2 72.47,13.84 ; 43.97,7.69 J4.7 ; J4.7 45.93,7.69 ; J4.7 44.95,6.71 ; J4.7 44.95,8.66 ; 8.86,58.16 J5.2 ; J5.2 7.88,59.14 ; J5.2 8.86,60.12 ; J5.2 9.83,59.14 ; 54.65,51.24 J16.2 ; J16.2 55.73,52.32 ; J16.2 54.65,53.4 ; J16.2 53.57,52.32
  BOTTOM w0.127: C30.2 34.49,41.76 34.62,41.63 v1(35.51,41.63) ; C50.1 v1(62.15,40.94) ; C6.1 48.93,6.67 48.95,6.69 J4.5 ; v1(61.44,32.6) 62.15,33.31 C51.1 ; v1(16.9,21.16) 17.19,21.45 U1.8 ; J4.8 42.95,6.3 43.1,6.16 C9.1 ; C32.1 v1(47.36,42.76) ; C37.1 v1(51.69,41.25) ; C29.1 v1(48.51,31.86) 48.15,31.86 47.9,32.11 47.9,32.41 48.15,32.66 52.9,32.66 53.4,32.16 53.4,31.91 53.49,31.82 C14.1 ; C12.1 v1(28.9,22.04) ; C59.1 21.4,70.79 v1(21.35,70.74) 21.35,70.3 21.45,70.2 C57.1 ; C67.1 v1(34.11,61.73) ; C42.2 v1(35.4,39.46) 35.4,38.66 31.9,38.66 31.65,38.91 31.65,48.41 32.5,49.26 C1.1 ; C71.1 v1(50.2,68.98) ; C65.1 v1(34.15,64.3) ; R19.1 v1(25.1,70.45) 25.1,70.89 25,70.99 C58.1 ; J12.2 74.3,14.82 74.76,14.36 C27.1 ; C16.1 7.34,41.06 7.38,41.1 J6.2 ; C15.1 6.64,58.96 6.82,59.14 J5.2 ; C53.1 v1(42.96,35.1) ; C68.1 43.51,51.06 44.36,51.91 v1(44.36,53.17) 44.36,53.91 44.21,54.06 R21.1 ; J8.2 7.82,4.75 7.81,4.76 C20.1 ; C35.1 v1(56.07,42.76) ; R1.1 v1(19.6,39.92) ; C47.1 v1(55.92,38.22) ; C18.1 6.29,22.8 6.42,22.92 7.75,22.92 7.81,22.86 J7.2 ; C69.1 v1(35.91,56.2) ; J10.2 74.55,51 74.73,51.18 C23.1 ; J4.1 56.95,6.69 57.03,6.62 C10.1 ; C45.1 v1(44.05,38.89) ; C21.1 v1(49.61,11.88) ; C38.1 v1(42.99,41.25) ; C52.1 v1(62.15,38.44) ; R18.1 v1(30.6,54.86) ; C62.1 v1(21.88,55.51) ; C64.1 v1(20.92,61.53) ; R15.1 v1(27.91,67.56) ; C3.1 50.9,6.27 50.95,6.32 J4.4 ; v1(46.65,68.92) 46.7,68.87 C70.1 ; C22.1 74.86,69.06 74.85,69.07 J9.2 ; C43.1 v1(47.45,39.76) ; C54.1 v1(33.46,37.21) ; C39.1 v1(39.75,41.6) ; C11.1 19.89,15.29 v1(19.8,15.2) ; C36.1 v1(56,39.76) ; C25.1 v1(46.9,32.99) ; C56.2 21.33,64.73 v1(21.25,64.81) ; C55.1 v1(28.67,32.93) ; J4.2 54.95,6.55 54.79,6.39 C7.1 ; v1(26.75,64.85) 26.71,64.81 C60.1 ; J4.7 44.95,6.23 45.02,6.17 C5.1 ; J4.3 52.95,6.69 52.9,6.64 C4.1 ; C44.1 v1(51.65,39.76) ; C17.1 v1(67.12,67.36) ; C8.1 47.01,6.64 46.95,6.69 J4.6 ; C49.1 v1(62.15,36.02) ; C19.1 v1(36.02,11.9) ; C66.1 v1(33.97,60.14) ; C34.1 v1(51.71,42.76) ; C31.2 v1(39.79,43.87) ; C28.1 v1(48.58,30.36) ; C24.1 75.06,32.96 75,32.9 J11.2 ; C2.1 v1(19.9,45.12) ; C61.2 v1(34.21,70.17) 33.78,70.17 33.45,69.84 33.45,67.62 33.45,67.62 33.45,67.6 34.14,66.91 C63.1 ; C13.1 v1(15.6,22.17) ; v1(55.92,41.37) 56.04,41.25 C41.1 ; R17.1 v1(30.76,56.26) ; C26.1 v1(41.11,33.11) ; C33.1 v1(43.03,42.76) ; C40.1 v1(47.41,41.25) ; C46.1 42.97,36.76 v1(42.88,36.67) ; C48.1 v1(39.71,39.66) ; R16.1 v1(20.17,67.55)
VBAT: length 26.1
  TOP w0.127: Q1.1 v1(30.99,69.13) ; v1(26.52,57.78) 26.24,58.06 U5.6 ; Q1.3 v1(30.93,66.59) ; Q1.2 v1(30.91,67.86) ; U5.7 v1(26.52,58.56)
  VCC w0.127: J15.1 32.53,73.11 ; J15.1 31.46,72.03 ; J15.1 32.53,70.95 ; J15.1 33.61,72.03
  BOTTOM w0.127: 24.94,61.53 24.8,61.39 v1(24.8,56.64) C62.2 ; 24.94,61.53 v1(24.99,61.58) ; 24.94,61.53 C64.2 ; C63.2 35.94,66.91 35.25,67.6 35.25,67.62 35.25,67.62 35.25,70.11 35.42,70.28 v1(36.01,70.28) C61.1 ; C65.2 v1(35.95,64.49)
VDD_MCU: length 305.6
  TOP w0.127: v1(39.56,45.83) 39.82,46.09 U4.144 ; U4.84 60.33,33.09 v1(60.4,33.16) ; U6.5 38.87,51.7 v1(39.51,51.06) ; U4.131 46.32,50.58 48.15,52.41 48.15,57.16 49.43,57.16 J14.1 ; U4.39 40.82,26.58 40.88,26.64 40.88,26.73 v1(41.07,26.92) ; U6.2 37.64,56.65 36.65,55.66 36.65,53.96 36.1,53.41 v1(36.1,51.24) ; v1(53.65,45.41) 53.9,45.16 58.15,45.16 58.22,45.09 U4.108 ; v1(51.87,27.69) 52.38,27.18 52.38,26.65 52.32,26.58 U4.62 ; v1(39.64,37.01) 38.94,37.01 38.86,37.09 U4.17 ; v1(47.25,27.65) 47.25,27.46 47.38,27.33 47.38,26.64 47.32,26.58 U4.52 ; v1(63.15,38.66) 62.4,39.41 61.9,39.41 61.15,38.66 59.19,38.66 U4.95 ; U2.10 v1(19.6,13.49) ; U4.30 37.94,30.66 v1(36.65,30.66) ; J17.4 v1(52.29,71.42) ; U4.72 v1(57.32,26.91) ; v1(51.4,48.16) 51.4,46.97 U4.121 ; v1(35.65,42.41) 35.83,42.59 U4.6 ; U3.2 v1(13.65,37.39)
  VCC w0.127: J1.7 23.34,48.59 ; J1.7 22.26,47.51 ; J1.7 22.26,49.67 ; J1.7 21.18,48.59 ; J6.1 9.85,39.1 ; J6.1 8.87,40.08 ; J6.1 7.89,39.1 ; J6.1 8.87,38.12 ; 71.49,16.82 J12.1 ; J12.1 73.45,16.82 ; J12.1 72.47,17.8 ; J12.1 72.47,15.84 ; J14.1 49.47,58.2 ; J14.1 49.47,56.04 ; J14.1 50.55,57.12 ; J14.1 48.39,57.12 ; 72.49,70.1 J9.1 ; J9.1 71.51,71.07 ; J9.1 72.49,72.05 ; J9.1 73.46,71.07 ; J11.1 72.51,35.88 ; J11.1 73.48,34.9 ; J11.1 72.51,33.92 ; J11.1 71.53,34.9 ; 8.8,19.88 J7.1 ; J7.1 9.78,20.86 ; J7.1 8.8,21.84 ; J7.1 7.82,20.86 ; 21.18,52.13 J1.4 ; J1.4 22.26,51.05 ; J1.4 23.34,52.13 ; J1.4 22.26,53.21 ; J5.1 9.83,57.14 ; J5.1 8.86,58.12 ; J5.1 7.88,57.14 ; J5.1 8.86,56.16 ; J10.1 72.48,53.98 ; J10.1 72.48,52.02 ; J10.1 73.46,53 ; J10.1 71.5,53 ; J8.1 8.81,3.73 ; J8.1 8.81,1.78 ; J8.1 7.83,2.75 ; J8.1 9.79,2.75 ; 49.57,51.24 J16.1 ; J16.1 48.49,52.32 ; J16.1 49.57,53.4 ; J16.1 50.65,52.32
  BOTTOM w0.127: C11.2 v1(19.6,13.49) ; v1(60.75,39.58) 60.75,39.38 60.28,38.91 59.66,38.91 58.98,38.22 C47.2 ; v1(60.75,39.58) 60.31,39.58 60.13,39.76 C36.2 ; v1(60.75,39.58) 60.75,40.6 60.1,41.25 C41.2 ; C15.2 5.9,57.03 6.03,56.91 7.63,56.91 7.87,57.14 J5.1 ; 63.15,39.52 63.15,41.92 ; 63.15,39.52 v1(63.15,38.66) 63.15,37.12 ; 63.15,39.52 C52.2 ; 63.15,41.92 63.15,42.51 62.9,42.76 v1(60.5,42.76) ; 63.15,41.92 C50.2 ; J6.1 7.88,39.1 7.72,39.26 C16.2 ; C68.2 v1(39.51,51.06) ; 49.42,42.76 49.42,46.87 50.7,48.16 ; 49.42,42.76 49.4,42.74 49.4,41.25 ; 49.42,42.76 C32.2 ; 50.7,48.16 49.57,49.29 J16.1 ; 50.7,48.16 v1(51.4,48.16) ; J8.1 7.82,2.75 7.61,2.96 C20.2 ; 63.15,37.12 63.15,34.72 C51.2 ; 63.15,37.12 C49.2 ; C18.2 7.03,20.87 7.04,20.86 J7.1 ; C71.2 52,68.41 52.9,68.41 52.9,68.91 ; 53.65,43.66 59.6,43.66 v1(60.5,42.76) ; 53.65,43.66 53.65,42.76 ; 53.65,43.66 v1(53.65,45.41) ; v1(36.58,49.26) C1.2 34.1,48.16 34.1,46.46 35.65,44.91 v1(35.65,42.41) ; 45.07,39.41 45.07,37.97 44.9,37.8 ; 45.07,39.41 45.85,39.41 C45.2 ; 45.07,39.41 45.07,41.25 ; v1(52.29,71.42) 52.9,70.81 52.9,68.91 ; J14.1 47.4,57.12 45.61,58.91 34.88,58.91 C69.2 ; v1(39.64,37.01) 39.64,33.65 v1(36.65,30.66) ; C39.2 40.65,40.77 ; 40.65,40.77 40.65,38.05 40.9,37.8 v1(41.51,37.8) ; 40.65,40.77 40.65,42.85 C31.1 ; 57.15,35.41 45.73,35.41 C53.2 ; 57.15,35.41 57.15,31.82 ; 57.15,35.41 59.4,35.41 60.4,34.41 v1(60.4,33.16) ; C3.2 v1(50.9,2.14) ; v1(60.5,42.76) C35.2 ; R6.1 57.15,30.34 ; 57.15,30.34 57.15,31.82 ; 57.15,30.34 57.32,30.17 v1(57.32,26.91) ; C38.2 45.07,41.25 ; 45.07,41.25 45.07,42.76 C33.2 ; 49.4,41.25 49.4,39.76 C43.2 ; 49.4,41.25 C40.2 ; C7.2 54.79,2.18 v1(54.86,2.11) ; C14.2 57.15,31.82 ; C13.2 14.68,25.06 14.57,25.17 v1(14.13,25.17) R2.1 ; 52.9,68.91 54.15,68.91 54.65,68.41 54.65,67.96 R25.2 ; C44.2 53.8,39.76 53.65,39.91 53.65,41.25 ; R9.2 v1(66.16,69.18) ; J11.1 73.5,34.9 73.64,34.76 C24.2 ; C8.2 v1(47.01,2.11) ; 53.65,42.76 53.65,41.25 ; 53.65,42.76 C34.2 ; J12.1 73.46,16.82 74.12,16.16 C27.2 ; C23.2 73.49,52.98 73.47,53 J10.1 ; C22.2 73.69,70.86 73.48,71.07 J9.1 ; C6.2 v1(48.93,2.07) ; J1.4 20.9,50.77 20.9,46.16 C2.2 ; R11.2 v1(51.51,17.1) ; R10.2 v1(37.82,17.59) ; v1(41.51,37.8) 44.9,37.8 ; v1(41.51,37.8) C48.2 ; 44.9,37.8 44.9,36.76 C46.2 ; 53.65,41.25 C37.2 ; R12.2 v1(44.55,29.03) ; C12.2 v1(28.9,26.35) ; R20.2 v1(36.1,51.24) ; C10.2 v1(57.03,2.07) ; C5.2 v1(45.02,2.08) ; C4.2 v1(52.9,2.12) ; C9.2 v1(43.1,2.11) ; U1.16 v1(26.65,28.4)
VDDA: length 14.7
  TOP w0.127: v1(34.15,30.66) 34.15,29.91 34.97,29.09 U4.33
  BOTTOM w0.127: 39.65,29.41 40.03,29.03 R12.1 ; 39.65,29.41 39.65,29.91 40.26,30.52 R13.1 ; 39.65,29.41 37.4,29.41 37.15,29.66 36.56,29.66 35.56,30.66 v1(34.15,30.66)
VIN: length 20.9
  TOP w0.127: 38.05,66.13 Q1.6 ; Q1.6 39.55,66.59 v1(39.62,66.52) ; Q1.6 38.05,67.05 ; Q1.8 v1(39.63,69.13) ; 38.05,64.86 Q1.5 ; Q1.5 v1(39.55,65.32) ; Q1.5 38.05,65.78 ; D1.1 37.87,63.44 ; D1.1 37.87,62.08 ; D1.1 39.22,62.76 ; D1.1 36.85,62.76 ; Q1.7 v1(39.66,67.86) ; Q1.7 38.05,68.32 ; Q1.7 38.05,67.4 ; v1(40.4,60.16) 40.4,58.16 40.16,57.92 U6.1
  BOTTOM w0.127: v1(40.4,60.16) 38,60.16 v1(37.98,60.14) C66.2 ; C67.2 v1(38.08,61.73)
I1_IN: length 10.9
  TOP w0.127: U2.1 24.8,18.56 25.15,18.91 25.82,18.91 26.9,19.99 26.9,22.41 v1(26.15,23.16)
  BOTTOM w0.127: U1.15 25.38,24.73 26.15,23.96 v1(26.15,23.16)
I2_IN: length 6
  TOP w0.127: U2.2 24.15,19.16 24.65,19.66 v1(25.65,19.66)
  BOTTOM w0.127: v1(25.65,19.66) 26.4,19.66 26.65,19.91 U1.1
I3_IN: length 8.2
  TOP w0.127: v1(25.4,23.16) 23.5,21.26 U2.3
  BOTTOM w0.127: v1(25.4,23.16) 25.4,21.45 U1.2
I4_IN: length 4.9
  TOP w0.127: v1(22.9,18.91) 22.9,17.49 U2.4
  BOTTOM w0.127: U1.3 24.11,19.37 23.65,18.91 v1(22.9,18.91)
I5_IN: length 4.7
  TOP w0.127: v1(22.9,19.66) 22.2,19.66 U2.5
  BOTTOM w0.127: U1.4 22.84,19.72 v1(22.9,19.66)
I6_IN: length 7.5
  TOP w0.127: U2.6 21.55,23.06 v1(21.65,23.16)
  BOTTOM w0.127: 21.56,21.45 21.65,21.45 v1(21.65,23.16)
I7_IN: length 4.2
  TOP w0.127: U2.7 v1(20.9,18.91)
  BOTTOM w0.127: U1.6 20.3,19.76 20.4,19.66 20.4,19.41 v1(20.9,18.91)
I8_IN: length 9
  TOP w0.127: U2.8 20.25,16.82 20.24,16.82 19.82,16.41 18.4,16.41 17.65,17.16 v1(17.65,19.41)
  BOTTOM w0.127: v1(17.65,19.41) 18.4,19.41 19.03,20.03 U1.7
OUT1: length 11.3
  TOP w0.127: U2.18 24.8,10.41 25.05,10.16 31.37,10.16 J3.1
OUT2: length 12.8
  TOP w0.127: v1(31.9,11.16) 30.65,12.41 24.15,12.41 U2.17
  BOTTOM w0.127: v1(31.9,11.16) 31.9,7.63 J3.2
OUT3: length 8.8
  TOP w0.127: U2.16 23.5,10.16 24,9.66 27.87,9.66 J3.3
OUT4: length 7.7
  TOP w0.127: U2.15 22.85,9.66 23.35,9.16 26.37,9.16 J3.4
OUT5: length 11.4
  TOP w0.127: v1(25.9,13.66) 23.15,13.66 22.2,12.71 U2.14
  BOTTOM w0.127: J3.5 25.93,13.63 v1(25.9,13.66)
OUT6: length 5
  TOP w0.127: U2.13 21.55,9.66 22.55,8.66 22.87,8.66 J3.6
OUT7: length 4.3
  TOP w0.127: J3.7 20.93,8.6 20.9,8.6 U2.12
OUT8: length 4
  TOP w0.127: J3.8 19.93,9.59 20.25,9.91 U2.11
PA0_SPI1_INT2: length 46.7
  TOP w0.127: J6.6 9.9,48.07 9.9,46.41 10.9,45.41 10.9,31.41 11.9,30.41 32.08,30.41 33.9,28.59 U4.34
PA2_SPI1_INT1: length 64.5
  TOP w0.127: v1(15.15,28.41) 15.97,27.59 U4.36
  BOTTOM w0.127: J5.6 10.9,65.1 10.9,50.66 15.15,46.41 v1(15.15,28.41)
PA3_SPI1_CS2: length 52.4
  TOP w0.127: v1(14.4,28.41) 14.4,27.41 15.15,26.66 15.15,26.16 15.59,25.72 U4.37
  BOTTOM w0.127: J6.7 9.9,50.07 9.9,48.66 14.4,44.16 v1(14.4,28.41)
PA4_SPI1_CS1: length 79.5
  TOP w0.127: v1(18.9,23.16) 20.4,24.66 33.4,24.66 35.4,22.66 39.65,22.66 41.32,24.33 U4.40
  BOTTOM w0.127: v1(18.9,23.16) 18.9,23.91 19.4,24.41 19.4,24.41 19.65,24.66 19.65,27.66 19.4,27.91 17.9,27.91 15.9,29.91 15.9,47.13 18.15,49.38 18.15,59.16 11.9,65.41 11.9,66.1 J5.7
PA5_SPI1_SCK: length 123.6
  TOP w0.127: J5.3 7.15,59.43 7.15,44.82 J6.3 7.15,41.38 7.15,2.91 8.9,1.16 31.9,1.16 35.15,4.41 35.15,13.29 34.53,13.91 31.65,13.91 30.15,15.41 30.15,16.5 32.81,19.16 38.4,19.16 41.82,22.58 U4.41
PA6_SPI1_MISO: length 132.9
  TOP w0.127: J5.5 6.4,62.68 v1(6.4,47.16) 6.4,2.41 8.15,0.66 33.9,0.66 37.15,3.91 37.15,13.66 35.9,14.91 32.65,14.91 31.9,15.66 31.9,17.78 32.78,18.66 38.9,18.66 42.32,22.08 U4.42
  BOTTOM w0.127: v1(6.4,47.16) 8.81,47.16 J6.5
PA7_SPI1_MOSI: length 79.8
  TOP w0.127: U4.43 42.82,24.49 42.9,24.41 v1(42.9,23.41) ; v1(38.65,23.41) 38.65,24.41 37.65,25.41 15.65,25.41 14.15,23.91 13.4,24.66 13.4,28.16 11.65,29.91 10.9,29.91 9.9,30.91 9.9,44.07 J6.4
  BOTTOM w0.127: v1(42.9,23.41) v1(38.65,23.41) ; J6.4 7.4,45.1 5.65,46.85 5.65,52.91 7.9,55.16 8.65,55.16 9.87,56.38 9.87,62.13 J5.4
PB2_SPI3_MOSI: length 67.2
  TOP w0.127: v1(64.15,46.66) 65.15,45.66 v1(68.15,45.66) 71.82,45.66 J10.5 ; U4.48 45.32,42.08 47.15,43.91 v1(50.15,43.91)
  BOTTOM w0.127: v1(64.15,46.66) 50.9,46.66 50.15,45.91 v1(50.15,43.91) ; J9.5 70.4,60.99 70.4,46.66 69.4,45.66 v1(68.15,45.66)
PB13_SPI2_SCK: length 79.9
  TOP w0.127: J8.3 11.15,9.09 v1(11.15,18.16) ; U4.74 60.22,28.09 v1(60.4,27.91)
  BOTTOM w0.127: J7.3 11.15,22.51 v1(11.15,18.16) 59.65,18.16 60.4,18.91 v1(60.4,27.91)
PC2_C_SPI2_MISO: length 53.2
  TOP w0.127: U4.28 26.97,31.59 25.65,32.91 v1(13.15,32.91) ; J8.5 9.9,11.84 9.9,27.76 J7.5
  BOTTOM w0.127: v1(13.15,32.91) 13.15,29.16 12.15,28.16 10.6,28.16 9.9,28.86 J7.5
PC3_C_SPI2_MOSI: length 61.7
  TOP w0.127: v1(4.9,8.66) 5.65,9.41 v1(5.65,26.41) ; U4.29 39.22,31.09 39.65,30.66 39.65,28.16 38.65,27.16 16.65,27.16 v1(15.9,26.41)
  BOTTOM w0.127: v1(5.65,26.41) 8.35,26.41 J7.4 9.9,26.86 10.6,26.16 15.65,26.16 v1(15.9,26.41) ; J8.4 4.99,8.75 v1(4.9,8.66)
PC10_SPI3_SCK: length 42.3
  TOP w0.127: J9.3 75.15,64.41 75.15,57.41 v1(76.4,56.16) ; J10.3 68.9,49 68.49,49.41 60.9,49.41 59.9,48.41 59.9,47.66 58.15,45.91 56.32,45.91 U4.111
  BOTTOM w0.127: J10.3 75.4,49 76.4,50 v1(76.4,56.16)
PC11_SPI3_MISO: length 38.8
  TOP w0.127: J10.4 68.74,47 v1(68.65,46.91) 66.9,48.66 v1(61.15,48.66) ; U4.112 55.82,47.83 55.9,47.91 v1(55.9,48.66)
  BOTTOM w0.127: v1(68.65,46.91) 68.65,61.24 J9.4 ; v1(55.9,48.66) v1(61.15,48.66)
PC14-OSC32_IN: length 11.3
  TOP w0.127: U4.8 36.33,41.59 35.65,40.91 35.4,40.91 v1(33.4,42.91) 30.9,42.91 30.6,42.61 Y1.2
  BOTTOM w0.127: C30.1 33.4,41.76 v1(33.4,42.91)
PC15-OSC32_OUT: length 10.9
  TOP w0.127: U4.9 36.83,41.09 36.15,40.41 34.65,40.41 34.65,40.66 34.65,40.66 v1(33.4,40.66) 31.15,40.66 30.6,40.11 Y1.1
  BOTTOM w0.127: C42.1 33.4,39.46 v1(33.4,40.66)
PD12_SPI2_CS1: length 79
  TOP w0.127: U4.81 60.4,31.59 v1(60.4,30.91) ; v1(27.49,19.66) 25.15,17.32 25.15,16.52 23.04,14.41 18.9,14.41 12.4,20.91 12.4,27.66 v1(11.15,28.91)
  BOTTOM w0.127: v1(60.4,30.91) 59.65,30.16 59.65,20.41 58.9,19.66 v1(27.49,19.66) ; v1(11.15,28.91) 11.15,30.51 J7.7
PD13_SPI2_CS2: length 62.8
  TOP w0.127: U4.82 58.33,32.09 57.9,31.66 v1(57.9,30.66) ; v1(29.9,20.66) 29.65,20.41 29.65,19.91 v1(25.9,16.16)
  BOTTOM w0.127: v1(57.9,30.66) 57.9,23.41 55.4,20.91 30.15,20.91 v1(29.9,20.66) ; J8.7 14.49,14.75 14.9,15.16 14.9,15.41 15.65,16.16 v1(25.9,16.16)
PD14_SPI2_INT1: length 92.1
  TOP w0.127: v1(35.9,16.91) 36.9,15.91 v1(61.15,15.91) ; U4.85 59.19,33.66 59.9,33.66 60.15,33.91 60.65,33.91 60.9,33.66 61.04,33.66 61.29,33.41 61.65,33.41 62.15,32.91 62.15,31.16 v1(61.15,30.16)
  BOTTOM w0.127: v1(35.9,16.91) 10.4,16.91 9.4,17.91 7.15,17.91 3.9,21.16 3.9,25.96 J7.6 ; v1(61.15,30.16) v1(61.15,15.91)
PD15_SPI2_INT2: length 81.3
  TOP w0.127: U4.86 57.9,34.09 v1(57.9,33.41)
  BOTTOM w0.127: J8.6 14.49,12.75 14.9,13.16 14.9,13.41 15.9,14.41 31.15,14.41 35.15,10.41 59.4,10.41 61.9,12.91 61.9,30.41 60.65,31.66 59.65,31.66 v1(57.9,33.41)
PE5_SPI4_MISO: length 69.2
  TOP w0.127: v1(40.4,35.91) 40.4,39.91 39.15,41.16 39.15,43.41 38.97,43.59 U4.4 ; v1(55.65,36.16) 55.65,29.41 57.9,27.16 57.9,27.15 58.15,26.9 J11.5 73.65,25.76 73.65,20.02 71.4,17.77 71.4,9.89 J12.5
  BOTTOM w0.127: v1(40.4,35.91) 55.4,35.91 v1(55.65,36.16)
PE6_SPI4_MOSI: length 115.8
  TOP w0.127: v1(34.65,43.16) 36.65,43.16 36.72,43.09 U4.5 ; J12.4 73.65,12 73.74,12 74.15,12.41 74.15,27.26 J11.4 67.91,28.9 v1(67.9,28.91) ; v1(32.65,47.41) v1(28.65,47.41)
  BOTTOM w0.127: v1(32.65,47.41) 34.65,45.41 v1(34.65,43.16) ; v1(67.9,28.91) 66.65,30.16 66.65,56.49 63.23,59.91 55.15,59.91 51.15,55.91 42.9,55.91 41.65,57.16 28.9,57.16 28.65,56.91 v1(28.65,47.41)
PE12_SPI4_SCK: length 38
  TOP w0.127: v1(70.9,23.66) 54.65,23.66 53.82,24.49 U4.65
  BOTTOM w0.127: J12.3 70.9,14.39 v1(70.9,23.66) 70.9,29.29 J11.3
PF12_SPI3_CS1: length 111.4
  TOP w0.127: U4.50 46.32,19.74 47.15,18.91 60.9,18.91 61.9,17.91 61.9,7.98 68.72,1.16 74.9,1.16 76.65,2.91 76.65,53.41 74.9,55.16 72.15,55.16 70.9,56.41 70.9,57.49 J9.7
PF13_SPI3_CS2: length 86.3
  TOP w0.127: U4.53 47.82,20.41 48.82,19.41 65.15,19.41 67.4,17.16 67.4,4.91 70.65,1.66 72.9,1.66 74.65,3.41 74.65,38.83 J10.7
PF14_SPI3_INT1: length 108.7
  TOP w0.127: v1(65.15,20.41) 49.15,20.41 48.32,21.24 U4.54
  BOTTOM w0.127: v1(65.15,20.41) 65.15,8.16 71.65,1.66 74.4,1.66 77.65,4.91 77.65,55.91 J9.6
PF15_SPI3_INT2: length 59
  TOP w0.127: v1(68.9,36.91) 68.9,40.91 67.4,42.41 63.9,42.41 63.4,42.91 63.4,43.41 63.9,43.91 70.65,43.91 71.15,43.41 71.15,43.26 71.41,43 J10.6 ; v1(68.9,21.91) 49.65,21.91 48.82,22.74 U4.55
  BOTTOM w0.127: v1(68.9,21.91) v1(68.9,36.91)
PG: length 19.3
  TOP w0.127: U5.9 23.75,59.56 23.65,59.66 23.65,60.91 21.9,62.66 15.65,62.66 14.65,61.66 14.65,56.16 14.75,56.06 U9.2
PG4_SPI4_CS1: length 25.3
  TOP w0.127: v1(65.15,34.41) 62.15,34.41 60.97,35.59 U4.89 ; J11.7 65.16,22.9 v1(65.15,22.91)
  BOTTOM w0.127: v1(65.15,34.41) v1(65.15,22.91)
PG5_SPI4_CS2: length 39.9
  TOP w0.127: v1(57.9,34.66) 57.9,35.66 58.33,36.09 U4.90
  BOTTOM w0.127: v1(57.9,34.66) 58.65,34.66 59.15,34.16 59.15,33.57 61.56,31.16 61.9,31.16 62.4,30.66 62.4,22.66 63.15,21.91 64.65,21.91 67.9,18.66 67.9,9.39 J12.7
PG6_SPI4_INT1: length 30.6
  TOP w0.127: U4.91 66.22,36.59 66.9,35.91 v1(70.9,35.91)
  BOTTOM w0.127: J11.6 74.15,26.54 74.15,30.16 74.9,30.91 75.65,30.91 76.65,31.91 76.65,35.41 76.15,35.91 v1(70.9,35.91)
PG7_SPI4_INT2: length 43
  TOP w0.127: v1(67.4,36.91) 67.22,37.09 U4.92
  BOTTOM w0.127: J12.6 70.15,9.14 70.15,36.66 69.15,37.66 67.4,37.66 v1(67.4,36.91)
PG11_USER_BUTTON_1: length 8.3
  TOP w0.127: v1(34.65,16.16) 33.86,16.95 SW2.1
  BOTTOM w0.127: C19.2 37.04,13.02 36.9,13.16 36.9,15.82 R10.1 36.02,16.16 v1(34.65,16.16)
PG12_SPI1_FSYNC: length 84.5
  TOP w0.127: U4.127 48.32,48.24 v1(47.15,49.41) ; 10.26,64.16 27.9,64.16 29.15,65.41 29.15,69.16 30.9,70.91 40.15,70.91 41.9,69.16 v1(41.9,49.41) ; 10.26,64.16 10.26,69.73 J5.8 ; 10.26,64.16 10.26,54.49 J6.8
  BOTTOM w0.127: v1(47.15,49.41) v1(41.9,49.41)
PG12_USER_BUTTON_2: length 8.3
  TOP w0.127: SW3.1 48.59,16.97 v1(48.65,16.91)
  BOTTOM w0.127: C21.2 50.65,13.24 50.65,15.84 R11.1 48.9,15.84 48.65,16.09 v1(48.65,16.91)
PG13_SPI2_FSYNC: length 70.7
  TOP w0.127: v1(46.9,48.41) 47.4,47.91 47.82,47.91 U4.128 ; J7.8 7.65,33.71 7.65,17.92 J8.8 ; v1(43.4,48.16) 43.15,48.41 37.15,48.41 35.4,46.66 v1(10.9,46.66)
  BOTTOM w0.127: J7.8 10.9,36.96 v1(10.9,46.66) ; v1(46.9,48.41) 43.65,48.41 v1(43.4,48.16)
PG14_SPI3_FSYNC: length 49.7
  TOP w0.127: U4.129 47.32,45.91 47.4,45.91 47.65,45.66 v1(50.9,45.66) ; J10.8 71.15,40.33 71.15,42.41 70.4,43.16 v1(64.15,43.16)
  BOTTOM w0.127: J10.8 71.4,40.08 71.4,55.99 J9.8 ; v1(50.9,45.66) 51.4,46.16 61.15,46.16 v1(64.15,43.16)
PG15_SPI4_FSYNC: length 110.2
  TOP w0.127: J11.8 70.4,18.79 70.4,4.89 J12.8 ; v1(75.4,20.91) 75.4,52.41 73.65,54.16 62.15,54.16 58.9,57.41 58.9,62.41 57.15,64.16 45.9,64.16 45.4,63.66 45.4,61.91 47.15,60.16 47.15,52.66 45.82,51.33 U4.132
  BOTTOM w0.127: v1(75.4,20.91) 75.39,20.9 J11.8
PH0-OSC_IN: length 16.1
  TOP w0.127: Y2.1 30.2,35.11 30.4,34.91 v1(31.4,34.91) 32.15,34.91 32.97,34.09 U4.23
  BOTTOM w0.127: C55.2 28.67,34.91 v1(31.4,34.91) 32.9,33.41 33.15,33.41 33.38,33.64 R14.2
PH1-OSC_OUT: length 18.3
  TOP w0.127: 31.8,31.91 31.4,31.91 v1(31.15,32.16) ; 31.8,31.91 33.15,31.91 34.83,33.59 U4.24 ; 31.8,31.91 Y2.3
  BOTTOM w0.127: 33.38,31.83 34.24,31.83 34.24,35.96 C54.2 ; 33.38,31.83 R14.1 ; 33.38,31.83 31.48,31.83 v1(31.15,32.16)
STAT1: length 5.7
  TOP w0.127: U7.2 17.3,60.16 18.4,59.06 U5.3
STAT2: length 11.1
  TOP w0.127: U8.2 17.15,51.76 18.15,52.76 18.15,58.16 18.65,58.66 19.55,58.66 19.65,58.56 U5.4
VREF+: length 17
  TOP w0.127: U4.32 36.72,29.59 36.65,29.66 v1(35.65,29.66)
  BOTTOM w0.127: v1(35.65,29.66) 37.15,28.16 41.65,28.16 41.9,28.41 41.9,30.52 R13.2 43.9,30.52 43.9,31.96 ; C25.2 43.9,31.96 ; 43.9,31.96 C26.2
N01598: length 7.9
  TOP w0.127: v1(24.15,70.16) 24.15,67.91 24.5,67.56 J13.A5
  BOTTOM w0.127: v1(24.15,70.16) 24.15,67.66 24.25,67.56 R15.2
N01665: length 8.2
  TOP w0.127: J13.B5 23.4,65.93 23.4,66.91 22.4,67.91 v1(22.4,70.16)
  BOTTOM w0.127: v1(22.4,70.16) 22.4,67.55 R16.2
N02907: length 7.3
  TOP w0.127: v1(26.65,60.16) 25,60.16 U5.10
  BOTTOM w0.127: R17.2 26.8,56.26 25.9,57.16 25.9,59.41 v1(26.65,60.16)
N02981: length 9.6
  TOP w0.127: U5.8 23.8,59.06 23.65,58.91 v1(23.65,54.91)
  BOTTOM w0.127: R18.2 23.7,54.86 v1(23.65,54.91)
N04161: length 40.9
  TOP w0.127: v1(57.65,55.41) 57.32,55.08 U4.109
  BOTTOM w0.127: J1.10 29.88,50.14 31.4,51.66 31.4,51.91 34.65,55.16 36.15,55.16 37.15,56.16 39.9,56.16 40.65,55.41 v1(57.65,55.41)
N04181: length 63.6
  TOP w0.127: U4.105 60.58,43.59 61.4,44.41 61.4,47.52 v1(61.26,47.66) ; J1.9 27.34,49.85 28.65,51.16 28.65,57.66 29.65,58.66 31.4,58.66 33.15,56.91 v1(33.15,51.16)
  BOTTOM w0.127: v1(61.26,47.66) 61.9,48.3 61.9,51.16 58.9,54.16 54.9,54.16 54.15,54.91 42.15,54.91 41.9,54.66 41.9,53.41 40.9,52.41 38.65,52.41 36.9,50.66 33.65,50.66 v1(33.15,51.16)
N04185: length 50.4
  TOP w0.127: U4.104 57.58,43.09 56.65,42.16 56.65,37.66 v1(56.15,37.16) ; v1(50.9,37.16) 50.9,44.41 50.4,44.91 39.4,44.91 38.65,45.66 25,45.66 J2.2
  BOTTOM w0.127: v1(56.15,37.16) v1(50.9,37.16)
N04189: length 66.5
  TOP w0.127: v1(47.9,34.66) v1(47.9,38.66) ; U4.103 58.08,42.59 57.15,41.66 57.15,35.41 v1(56.4,34.66)
  BOTTOM w0.127: v1(47.9,38.66) 47.15,38.66 46.65,39.16 46.65,43.41 47.9,44.66 47.9,49.66 47.4,50.16 32.15,50.16 31.15,49.16 31.15,47.66 27.9,44.41 21.21,44.41 J2.1 ; v1(56.4,34.66) v1(47.9,34.66)
N04193: length 79
  TOP w0.127: v1(34.81,32.66) 35.15,33 35.15,33.09 U4.25 ; v1(29.9,57.91) 29.88,57.89 J1.1 31.1,50.91 32.15,50.91 v1(34.9,48.16) ; v1(62.65,69.66) 61.65,69.66 61.23,70.08 SW1.1
  BOTTOM w0.127: R9.1 63.3,70.31 v1(62.65,69.66) 62.65,67.36 ; v1(29.9,57.91) 32.9,60.91 48.9,60.91 50.65,62.66 50.65,64.16 51.9,65.41 60.7,65.41 62.65,67.36 ; v1(34.9,48.16) 36.9,46.16 36.9,34.75 v1(34.81,32.66) ; 62.65,67.36 C17.2
N05042: length 30.7
  TOP w0.127: v1(17.9,40.66) 25.15,40.66 27.9,37.91 33.65,37.91 34.65,36.91 34.65,35.41 35.47,34.59 U4.22
  BOTTOM w0.127: v1(17.9,40.66) 16.4,39.16 16.4,35.91 16.65,35.66 17.15,35.66 17.33,35.48 R4.2
N05048: length 61.4
  TOP w0.127: U4.69 55.82,26.91 v1(55.15,26.91) ; U3.7 12.52,31.04 11.9,31.66 11.9,34.41 12.9,35.41 v1(26.65,35.41)
  BOTTOM w0.127: 55.15,27.91 53.4,27.91 52.9,28.41 45.4,28.41 44.65,27.66 33.65,27.66 31.4,29.91 31.4,30.41 30.4,31.41 28.65,31.41 26.65,33.41 v1(26.65,35.41) ; 55.15,27.91 55.4,28.16 55.4,30.34 R6.2 ; 55.15,27.91 v1(55.15,26.91)
N05076: length 19
  TOP w0.127: v1(35.4,37.41) 35.4,36.41 36.22,35.59 U4.20
  BOTTOM w0.127: v1(35.4,37.41) 34.9,37.91 26.4,37.91 24.15,35.66 22.33,35.66 R5.2
N05082: length 20.5
  TOP w0.127: U4.21 39.08,35.09 39.15,35.16 v1(41.65,35.16)
  BOTTOM w0.127: v1(41.65,35.16) 42.9,33.91 44.9,33.91 45.9,32.91 45.9,30.91 47.65,29.16 54.5,29.16 R7.1
N05106: length 32.7
  TOP w0.127: U4.1 29.33,45.09 25.9,41.66 v1(18.4,41.66)
  BOTTOM w0.127: v1(18.4,41.66) 18.65,41.41 18.65,32.41 18.15,31.91 17.4,31.91 R8.2
N05112: length 16.7
  TOP w0.127: v1(29.9,28.16) 36.65,28.16 36.72,28.09 U4.35
  BOTTOM w0.127: v1(29.9,28.16) 27.43,30.63 R3.1
N08089: length 8.1
  TOP w0.127: U6.4 38.87,54.29 40.15,54.29 v1(40.15,53.66)
  BOTTOM w0.127: R21.2 41,53.66 v1(40.15,53.66) 36.65,53.66 36.65,54.36 R20.1
N09057: length 36.2
  TOP w0.127: U4.110 56.82,58.24 54.65,60.41 54.65,62.66 53.9,63.41 v1(49.9,63.41) 46.35,63.41 J17.10
  BOTTOM w0.127: 49.9,66.66 49.4,66.66 49.15,66.91 49.15,67.96 C70.2 ; 49.9,66.66 52.4,66.66 52.9,67.16 52.9,67.66 53.7,67.66 R25.1 ; 49.9,66.66 v1(49.9,63.41)
N09085: length 53.3
  TOP w0.127: J17.2 50.09,70.91 49.34,70.16 49.15,70.16 49.15,68.91 48.9,68.66 48.4,68.66 48.15,68.91 48.15,69.16 48.4,69.41 48.4,69.91 48.15,70.16 44.4,70.16 43.65,69.41 43.65,68.66 43.4,68.41 43.15,68.41 42.9,68.16 42.9,67.91 43.15,67.66 44.15,67.66 44.4,67.41 44.4,67.16 44.15,66.91 43.15,66.91 42.9,66.66 42.9,66.41 43.15,66.16 44.15,66.16 44.4,65.91 44.4,65.66 44.15,65.41 43.15,65.41 42.9,65.16 42.9,64.91 43.15,64.66 44.15,64.66 44.4,64.41 44.4,64.16 44.15,63.91 43.9,63.91 43.65,63.66 43.65,61.16 43.9,60.91 44.9,60.91 45.15,60.66 45.15,58.91 44.9,58.66 44.65,58.66 44.4,58.91 44.4,59.91 44.15,60.16 43.9,60.16 43.65,59.91 43.65,52.41 43.4,52.16 42.9,52.16 42.65,51.91 42.65,51.66 42.9,51.41 45.15,51.41 45.4,51.16 45.4,50.91 45.15,50.66 43.15,50.66 42.9,50.41 42.9,50.16 43.15,49.91 44.65,49.91 44.9,49.66 44.9,48.16 44.82,48.08 U4.134
N09089: length 53
  TOP w0.127: v1(47.9,71.66) 48.99,71.66 J17.1 ; v1(47.9,62.16) 47.9,59.16 48.15,58.91 51.65,58.91 51.9,58.66 51.9,50.91 51.65,50.66 49.15,50.66 48.82,50.33 U4.126
  BOTTOM w0.127: v1(47.9,71.66) 47.9,69.41 47.65,69.16 47.65,67.41 47.9,67.16 48.4,67.16 48.65,66.91 48.65,66.66 48.4,66.41 47.15,66.41 46.9,66.66 46.9,66.91 46.65,67.16 46.4,67.16 46.15,66.91 46.15,64.66 45.9,64.41 42.4,64.41 42.15,64.16 42.15,63.91 42.4,63.66 46.65,63.66 46.9,63.91 46.9,65.66 47.15,65.91 47.4,65.91 47.65,65.66 47.65,65.16 47.9,64.91 48.9,64.91 49.15,64.66 49.15,64.41 48.9,64.16 47.9,64.16 47.65,63.91 47.65,62.41 v1(47.9,62.16)
N09093: length 60.3
  TOP w0.127: v1(67.4,39.41) 68.15,38.66 v1(68.15,36.91) ; U4.76 63.65,29.09 63.65,29.16 64.15,29.66 v1(68.15,29.66) ; v1(67.4,55.16) 67.4,61.97 64.65,64.72 64.65,66.66 62.65,68.66 56.9,68.66 56.69,68.87 J17.8
  BOTTOM w0.127: v1(68.15,36.91) v1(68.15,29.66) ; v1(67.4,55.16) v1(67.4,39.41)
N09097: length 56.9
  TOP w0.127: v1(61.9,55.41) 61.9,63.41 60.65,64.66 57.34,64.66 55.59,66.41 J17.7 ; v1(65.9,28.66) 60.4,28.66 60.33,28.59 U4.75
  BOTTOM w0.127: v1(61.9,55.41) 65.9,51.41 v1(65.9,28.66)
N09165: length 57.8
  TOP w0.127: v1(45.4,66.91) 53.15,66.91 53.39,67.15 J17.5 ; v1(41.15,66.91) v1(41.15,49.41) ; U4.27 37.94,32.16 v1(36.4,32.16)
  BOTTOM w0.127: v1(45.4,66.91) v1(41.15,66.91) ; v1(36.4,32.16) 37.9,33.66 37.9,49.16 38.15,49.41 v1(41.15,49.41)
N09169: length 45.6
  TOP w0.127: U4.123 50.32,48.58 53.4,51.66 v1(53.4,60.41) ; J17.3 51.19,71.12 v1(51.65,70.66) ; v1(63.15,63.66) 61.15,65.66 59.65,65.66 v1(58.15,67.16)
  BOTTOM w0.127: v1(51.65,70.66) 51.65,71.66 52.15,72.16 55.65,72.16 58.15,69.66 v1(58.15,67.16) ; v1(53.4,60.41) 56.65,63.66 v1(63.15,63.66)
N09317: length 41.2
  TOP w0.127: U4.58 50.32,24.49 50.4,24.41 v1(50.4,22.66)
  BOTTOM w0.127: v1(50.4,22.66) 30.4,22.66 29.65,23.41 29.65,23.91 29.4,24.16 26.88,24.16 25.9,25.14 25.9,27.66 25.65,27.91 22.4,27.91 22.15,27.66 22.15,25.16 22,25.01 20.4,25.01 20.3,25.12 U1.11
N09327: length 30.3
  TOP w0.127: v1(29.15,39.16) 29.15,38.41 35.9,38.41 36.9,37.41 36.9,36.59 U4.18
  BOTTOM w0.127: v1(29.15,39.16) 23.15,39.16 21.4,37.41 21.4,28.16 21.56,28 21.56,26.47
N09331: length 33.6
  TOP w0.127: v1(22.9,23.91) 30.15,23.91 v1(30.65,23.41) ; U4.60 51.32,24.74 51.4,24.66 v1(51.4,23.91)
  BOTTOM w0.127: v1(22.9,23.91) 22.9,24.66 22.84,24.72 U1.13 ; v1(51.4,23.91) 51.15,24.16 31.4,24.16 v1(30.65,23.41)
N09335: length 33.8
  TOP w0.127: U4.49 45.82,24.49 45.9,24.41 45.9,21.91 v1(42.9,18.91)
  BOTTOM w0.127: U1.14 24.11,24.45 24.65,23.91 24.65,19.41 25.15,18.91 v1(42.9,18.91)
N10077: length 34.6
  TOP w0.127: U4.138 42.82,47.91 38.33,47.91 36.58,46.16 23.31,46.16 21.4,44.25 21.4,42.66 21.9,42.16 24.04,42.16 J2.3
  BOTTOM w0.127: R1.2 22.84,40.96 J2.3
N023560: length 4.2
  TOP w0.127: U7.1 v1(12.4,60.16)
  BOTTOM w0.127: R22.2 12.9,58.16 12.4,58.66 v1(12.4,60.16)
N023820: length 4.7
  TOP w0.127: U8.1 12.5,51.76 v1(12.4,51.66)
  BOTTOM w0.127: R23.2 12.75,49.56 12.4,49.91 v1(12.4,51.66)
N025640: length 4.8
  TOP w0.127: v1(12.4,56.16) 12.5,56.06 U9.1
  BOTTOM w0.127: v1(12.4,56.16) 12.4,54.41 12.85,53.96 R24.2
N60130: length 9.3
  BOTTOM w0.127: U1.10 19.03,25.03 17.28,25.03 17.15,25.16 17.15,26.13 16.15,27.13 R2.2
N110068: length 8.3
  TOP w0.127: v1(52.65,30.41) 55.15,27.91 55.9,27.91 56.73,27.08 56.73,25.72 U4.71
  BOTTOM w0.127: v1(52.65,30.41) 52.6,30.36 C28.2
N110088: length 19.1
  TOP w0.127: U4.106 59.19,44.16 58.28,44.16 58.03,43.91 55.08,43.91 54.83,43.66 54.14,43.66 53.9,43.42 53.9,33.16 v1(52.65,31.91)
  BOTTOM w0.127: C29.2 51.3,31.91 v1(52.65,31.91)
N1399340: length 13.2
  TOP w0.127: U3.1 19.4,38.66 v1(19.4,38.66)
  BOTTOM w0.127: v1(19.4,38.66) 19.4,30.91 19.68,30.63 R3.2
N1399347: length 45
  TOP w0.127: U3.8 16.4,29.77 17.26,28.91 22.15,28.91 22.4,29.16 v1(30.65,29.16)
  BOTTOM w0.127: v1(30.65,29.16) 33.65,26.16 55.4,26.16 56.3,27.06 R7.2
N1399348: length 13.6
  TOP w0.127: v1(17.4,29.66) 23.15,29.66 23.26,29.77 U3.9
  BOTTOM w0.127: R8.1 17.4,33.66 16.9,33.66 16.65,33.41 16.65,29.66 v1(17.4,29.66)
N13993414: length 3.4
  TOP w0.127: v1(22.9,37.66) 23.17,37.39 U3.15
  BOTTOM w0.127: R5.1 22.33,37.41 22.58,37.66 v1(22.9,37.66)
N13993415: length 8.8
  TOP w0.127: v1(17.9,37.91) 20.9,37.91 21.65,38.66 U3.16
  BOTTOM w0.127: v1(17.9,37.91) 17.33,37.34 R4.1

## Copper pours and planes (outline as drawn; the poured copper is in the pictures)
5V on VCC: 28.91,65.61 33.2,65.61 33.2,64.62 33.19,64.61 33.19,64.56 33.89,63.86 35.59,63.86 35.66,63.79 35.66,62.2 28.74,62.2 28.74,65.44
5V on VCC: 11.2,73.26 21.4,73.26 21.98,73.25 24.47,73.26 27.36,73.24 28.81,73.25 28.93,65.56 28.95,59.25 29,59.19 28.87,59.05 19.89,59.05 19.89,55.79 19.92,55.76 11.5,55.76 11.28,55.99
GND on TOP: 43.92,58.36 43.92,52.51 46.15,52.51 46.74,53.1 46.74,57.75 46.12,58.37 43.91,58.37 43.9,58.36
GND on GND: 0.51,73.25 0.51,0.51 79.52,0.5 79.52,73.25
VBAT on VCC: 29.34,73.26 36.49,73.26 36.57,73.18 36.57,57.06 26.36,57.06 25.04,55.74 20.08,55.74 20.02,55.8 20.02,58.96 29.24,58.96 29.27,58.93 29.34,59 29.34,62.1 29.35,62.09 35.74,62.09 35.74,63.99 35.64,64.09 33.95,64.09 33.35,64.69 33.35,65.76 29.41,65.76 29.34,65.83
VDD_MCU on VCC: 79.51,73.24 79.49,0.66 0.6,0.66 0.6,73.24 11.14,73.24 11.27,55.61 25.63,55.72 26.73,56.99 39.92,56.99 39.94,57.01 39.94,73.18 40.06,73.25
VIN on TOP: 37.13,69.62 37.13,63.56 36.35,62.78 36.34,62.78 36.27,62.71 36.27,59.34 39.7,59.34 39.9,59.54 39.9,69.59 39.87,69.62
VIN on VCC: 36.62,73.25 36.62,57.04 39.78,57.04 39.78,73.25

## Text on the board
NCLEGEND-1-4: FIGURE | FINISHED_SIZE | 0.25 | 0.8 | 1.0 | 1.1 | 3.2 | DRILL CHART: TOP to BOTTOM | ALL UNITS ARE IN MILLIMETERS | PLATED | NON-PLATED | QTY | 273 | 83 | 16 | 4
